# Altium PCB Shift_Relays.PcbDoc
Units mm, origin at the board's own origin, x right, y up, seen from the top; angles counter-clockwise.
Board outline 54.7 x 69.83 mm, 2 copper layers (Top Layer, Bottom Layer); 11 components, 11 nets, 43 pads, 1 vias.
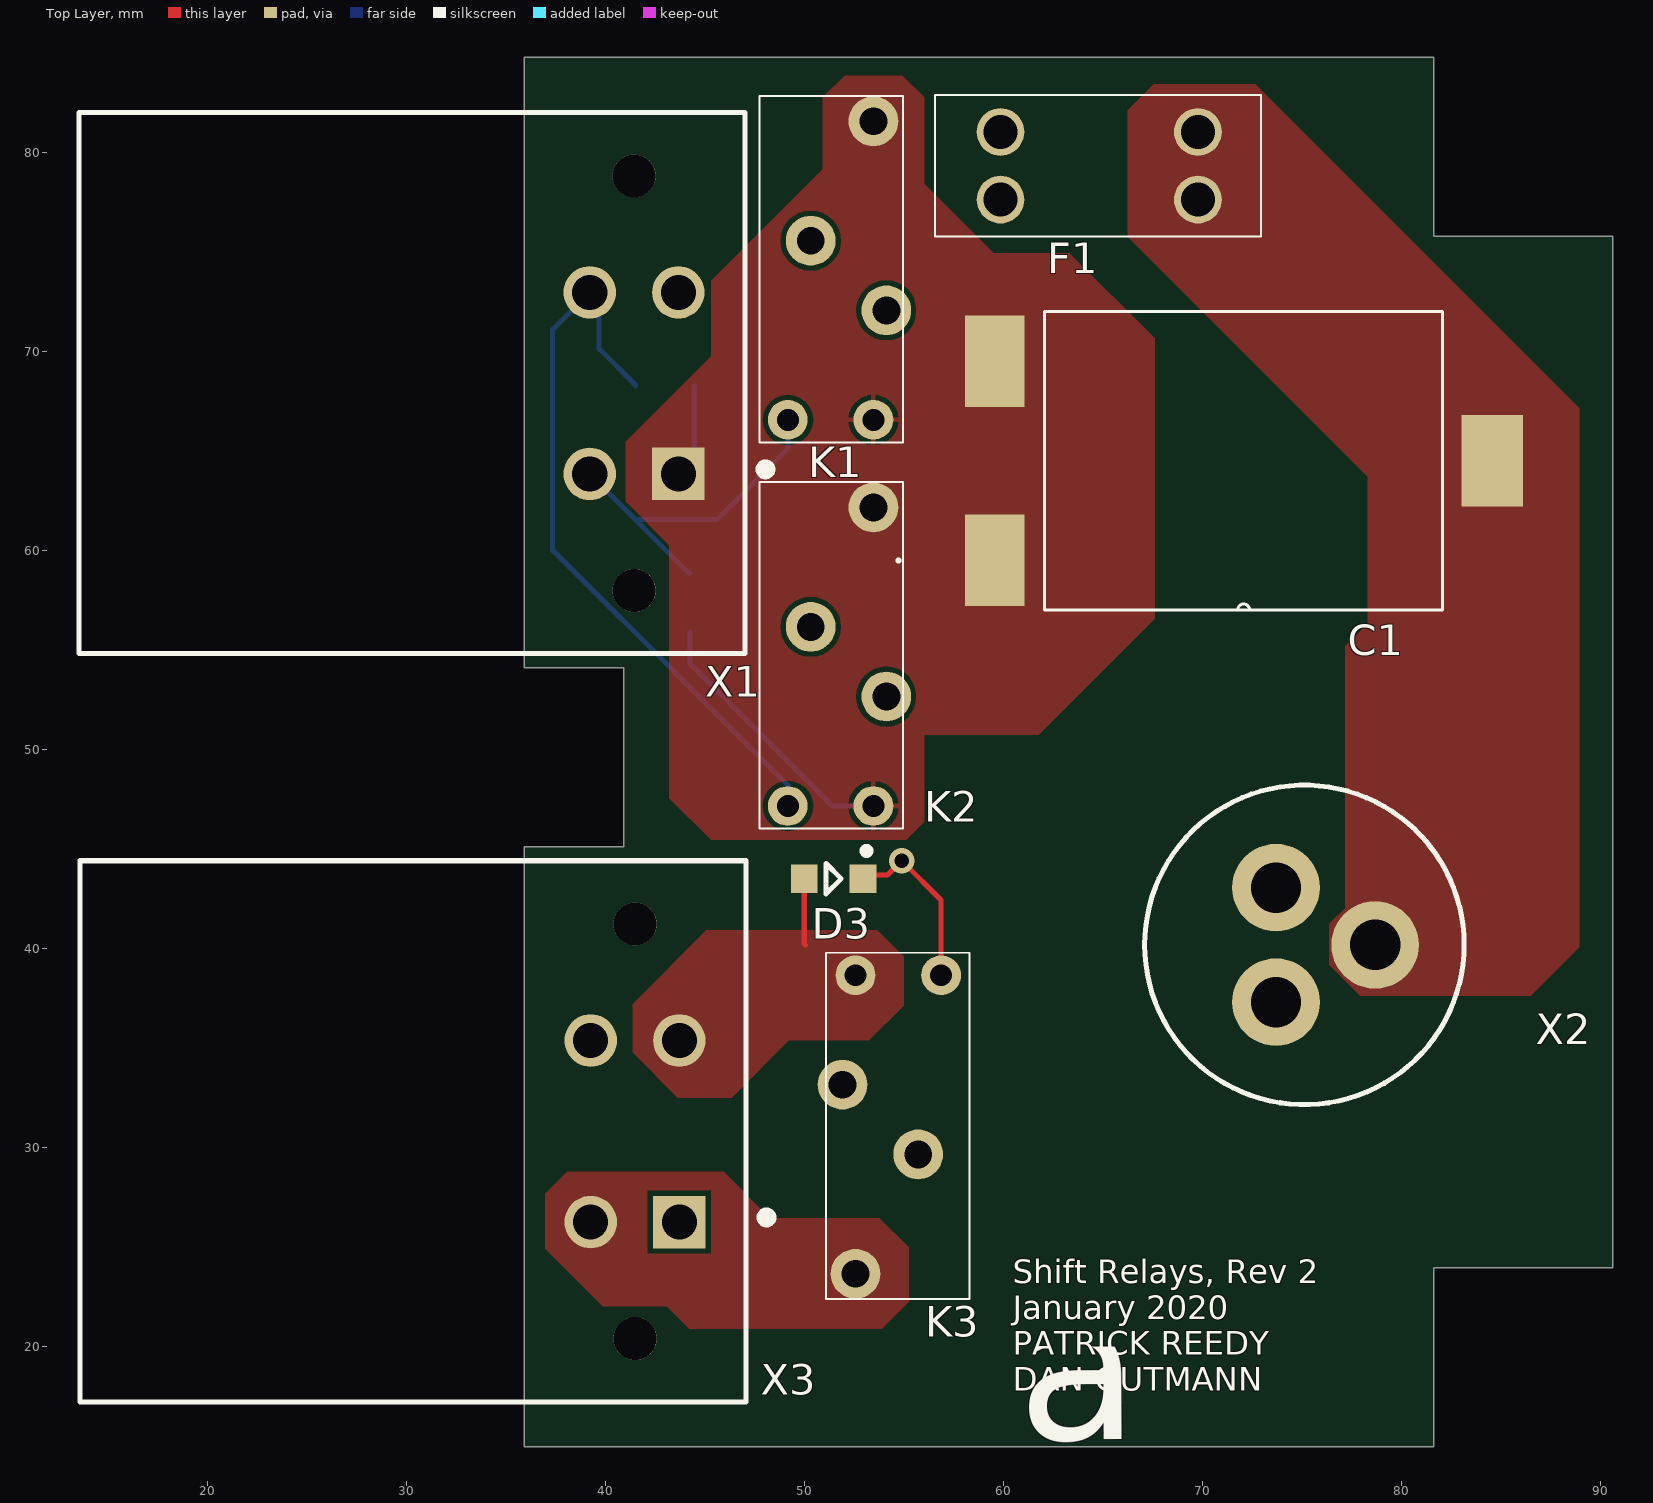
[diagram p0: Top Layer view]
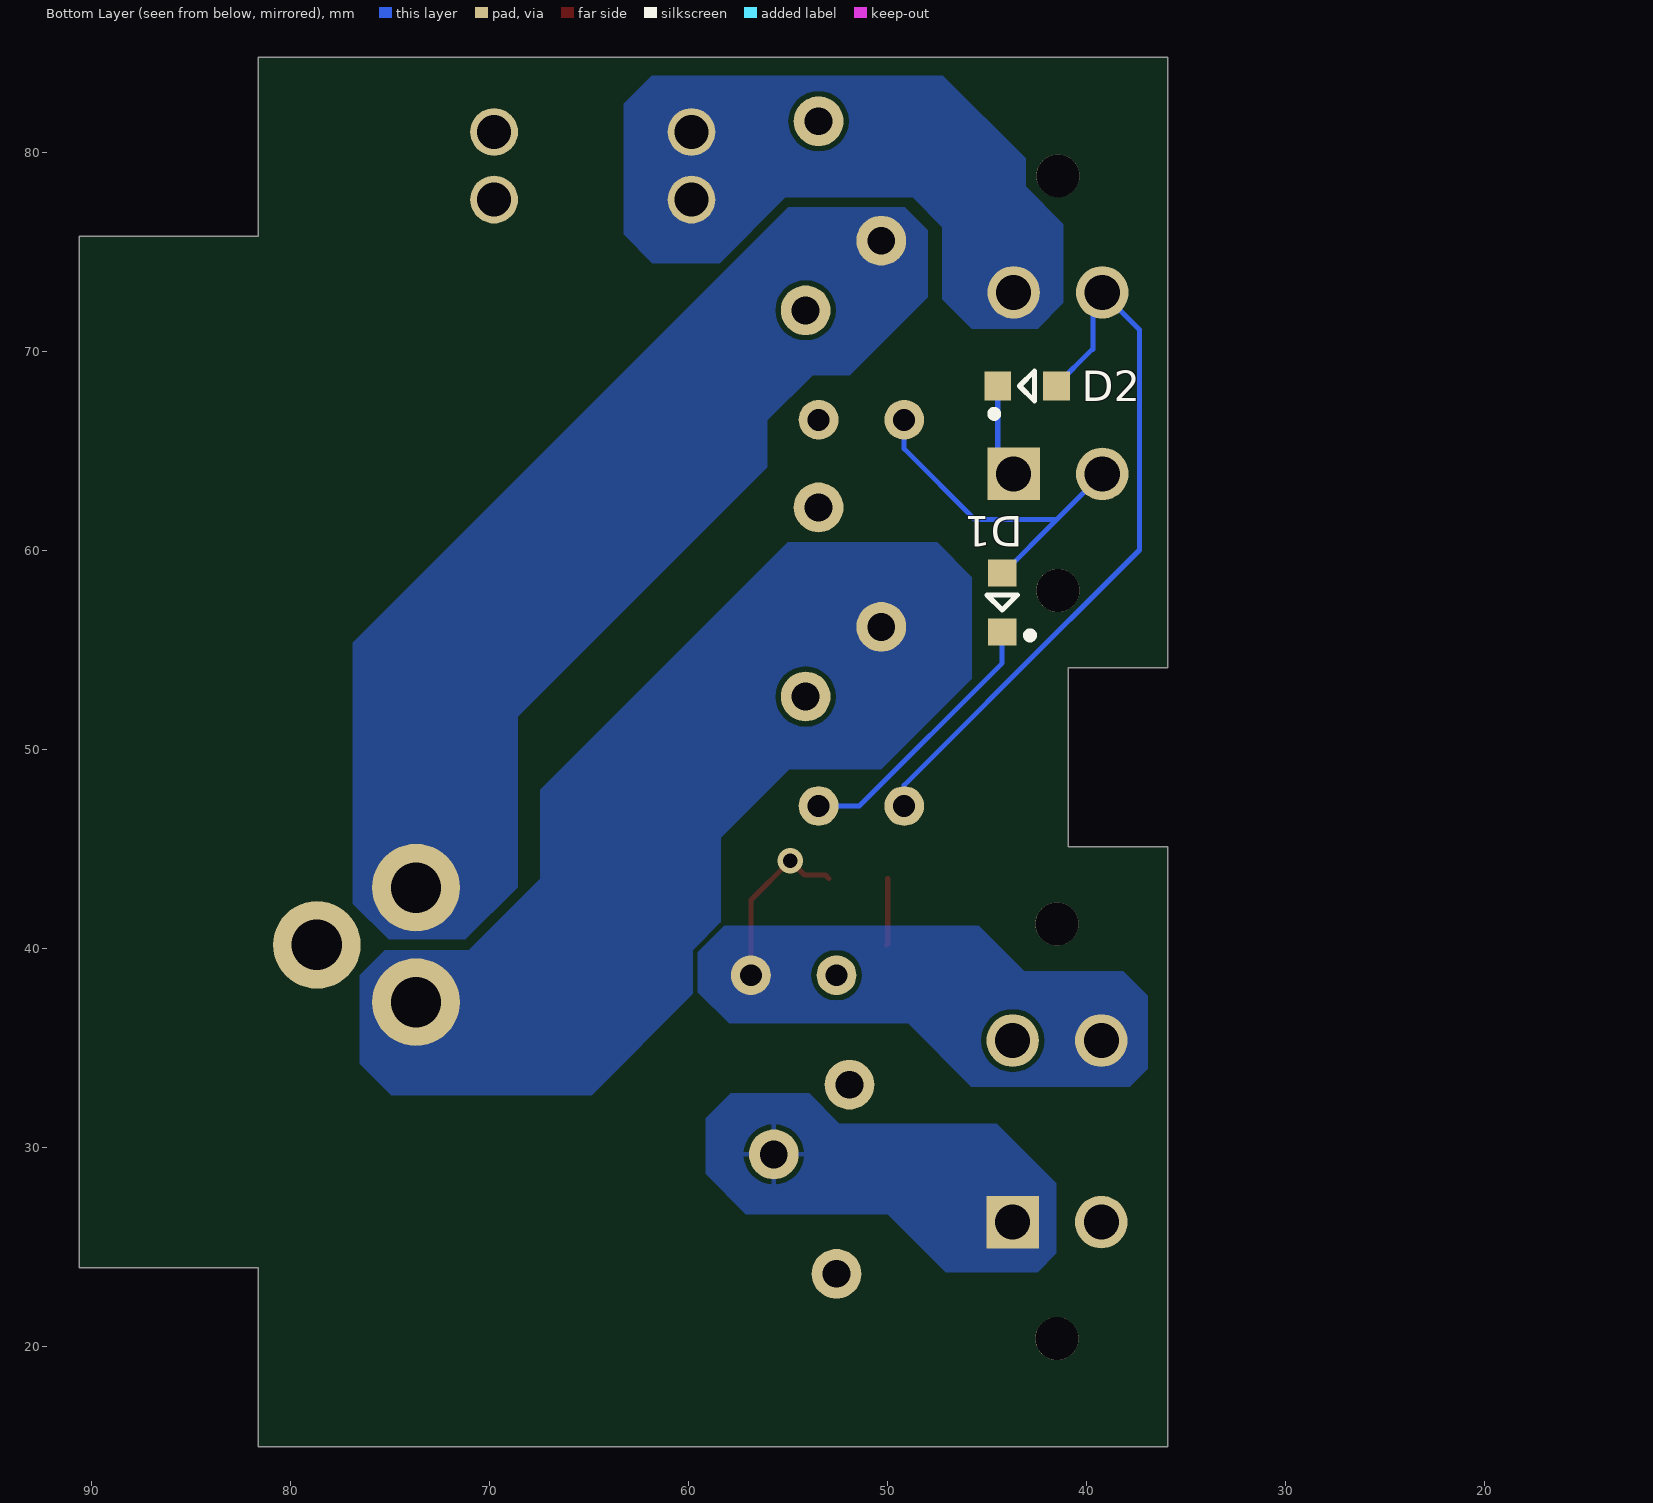
[diagram p1: Bottom Layer view, seen from below]

## Layer stack, top to bottom
Top Solder: solder mask 0.0102, Solder Resist, Dk 3.5
Top Layer: signal copper 0.0356
Dielectric 1: dielectric 0.32, FR-4, Dk 4.8
Bottom Layer: signal copper 0.0356
Bottom Solder: solder mask 0.0102, Solder Resist, Dk 3.5

## Board outline
35.9,54.125 40.9,54.125 40.9,45.125 35.9,45.125 35.9,14.975 81.6,14.975 81.6,23.975 90.6,23.975 90.6,75.8 81.6,75.8 81.6,84.8 35.9,84.8

## Design rules (kind name [scope] priority, off if disabled: settings)
BoardOutlineClearance [All] p1: gap=0.254 ignorepadtopadclearanceinfootprint=FALSE except(0: Arc-SplitContinuation Track-SplitContinuation SMDPad-SplitContinuation THPad-SplitContinuation Via-SplitContinuation Fill-SplitContinuation Poly-SplitContinuation Region-SplitContinuation Text-SplitContinuation)
Clearance [All] p1: gap=0.254 ignorepadtopadclearanceinfootprint=FALSE except(0: Arc-Hole Track-Hole SMDPad-Hole THPad-Hole Via-Hole Fill-Hole Poly-Hole Region-Hole Text-Hole)
PolygonConnect [All] p1: connectstyle=Relief reliefconductorwidth=0.254 reliefentries=4 polygonreliefangle="90 Angle" airgapwidth=0.254
RoutingVias [All] p1: holewidth=0.711 width=1.27 viastyle="Through Hole" minholewidth=0.711 minwidth=1.27 maxholewidth=0.711 maxwidth=1.27
SolderMaskExpansion [All] p1: expansion=0.102
Width [All] p1: maxlimit=0.254 minlimit=0.254 preferedwidth=0.254
30 further rules are at their usual default settings.

## Components (designator, comment, footprint, x,y, rotation, side; value= is the part's Value field where it differs from the comment)
C1 "Part Number: BZ05FB682ZSB" BZX5-S 72.05,64.525 r180 top value=Value
D1 "*" SOD123F 44.225,57.4 r270 bottom
D2 "*" SOD123F 42.975,68.275 r0 bottom
D3 "*" SOD123F 51.45,43.525 r0 top
F1 "Fuse" 3568-MiniFuseHolder 64.793,79.34 r0 top
K1 "ACTP112" ACTP112 49.64,81.577 r270 top
K2 "ACTP112" ACTP112 49.64,62.177 r270 top
K3 "ACTP112" ACTP112 56.36,23.675 r90 top
X1 "*" DTF13-4P 41.425,68.419 r270 top
X2 "=MfrPartNo" CONN_Shift 78.655,40.2 r90 top
X3 "*" DTF13-4P 41.475,30.835 r270 top

## Footprints (in the part's own frame and the unit in brackets; to place one, negate y for a bottom-side part, rotate by r counter-clockwise, add the part's x,y. Pads: shape width x height; smd on the part's side, far side on the other; paste and mask are expansions set on the pad)
3568-MiniFuseHolder [mm] "3568 Mini Fuse Holder"
  round 2.4 hole 1.7: 1(-4.96,-1.7) 1(-4.96,1.7) 2(4.96,-1.7) 2(4.96,1.7)
  silkscreen extent -8.25,-3.56 8.13,3.56, body extent -8,-4.19 8,3.38, height 16.17
ACTP112 [mm] "ACTP112, 12V Relay"
  round 2 hole 1.1: COIL1(15,3.81) COIL2(15,-0.49)
  round 2.5 hole 1.4: COM(0,3.81) NC(9.5,4.46) NO(6,0.66)
  silkscreen extent -1.27,-1.91 16.13,5.3, body extent -1.27,-1.91 16.13,5.33, height 13.5
BZX5-S [mil]
  rect 122x181 smd: 1(-492,0)
  rect 118x181 smd: 2(492,-197) 3(492,197)
  silkscreen extent -394,-296 686,296, body extent -490,-296 490,296, height 228
CONN_Shift [mm]
  round 4.4 hole 2.53: 1(2.875,4.98) 2(0,0) 3(-2.875,4.98)
  silkscreen extent -8.02,-4.47 8.02,11.58, body extent -10.66,-7.1 14.4,14.22, height 15.56
DTF13-4P [mm]
  rect 2.64x2.64 hole 1.76: 1(4.561,2.223)
  round 2.64 hole 1.76: 2(4.561,-2.227) 3(-4.559,-2.227) 4(-4.559,2.223)
  round 2.16 hole 2.16 unplated: None(-10.415,0) None(10.415,0)
  silkscreen extent -13.59,-27.88 13.59,6.85, body extent -13.59,-27.94 13.59,5.52, height 23.53
SOD123F [mm] "SODFL, 2-Leads, Body 1.80x3.50mm, IPC Low Density"
  rect 1.35x1.45 smd: 1(-1.475,0) 2(1.475,0)
  silkscreen extent -0.38,-0.76 1.75,1.5, body extent -1.75,-0.95 1.75,0.95, height 1.15

## Part data
C1: library part 11, "6.8mF (EDLC) Supercapacitor 15V BZ05, 3 Lead", Manufacturer_Part_Number=BZ05FB682ZSB, package="Surface Mount", percent tolerance=80, voltage=15, Built_By=EMA_UL_Team, Copyright="Copyright (C) 2018 Accelerated Designs. All rights reserved", createdby="Patrick Reedy", createddate="1/11/2020 3:48:08 PM", ESR=1, id=11, link=https://www.digikey.com/products/en/capacitors/electric-double-layer-capacitors-edlc-supercapacitors/61?k=&pkeyword=&sv=0&pv2049=u6.8mF&sf=1&FV=-8%7C61&quantity=&ColumnSort=0&page=1&pageSize=25, name=BZ05FB682ZSB, quantity=0, RefDes=RefDes, Type=DEV, Vendor="AVX Corporation"
D1 D2 D3: library part 2, "Diode Super Barrier 40V 1A Surface Mount SOD-", package=SOD-123, id=2, link=https://www.digikey.com/product-detail/en/diodes-incorporated/1N5819HW1-7-F/1N5819HW1-7-FDITR-ND/5768523, name=1N5819, quantity=0
F1: library part 3, id=3, iinterrupt=0, itrip=0, link=https://www.digikey.com/product-detail/en/keystone-electronics/3568/36-3568-ND/2137306, name="3568 Mini Fuse Holder", quantity=0, vmax=0
K1 K2 K3: library part 1, current=0, voltage=12, createdby=Kevin, id=1, LatestRevisionDate=17-Jul-2002, LatestRevisionNote="Re-released for DXP Platform.", link=https://www.digikey.com/product-detail/en/panasonic-electric-works/ACTP112/255-5163-ND/4691838, name=ACTP112, PackageReference=MODULE5B, Published=8-Jun-2000, Publisher="Altium Limited", quantity=0
X1 X3: library part 15, "DTF13-4P", id=15, link=https://www.te.com/usa-en/product-DTF13-4P.html, name=DTF13-4P, numcontacts=4, quantity=0
X2: library part 31, "Connector for Shift Relays", createdby=Patrick, id=31, name="CONN Shift", numcontacts=3, quantity=0

## Via types
v1: diameter 1.27, hole 0.711, Top Layer to Bottom Layer, 1 vias

## Nets (pads, with @x,y where several pads share a name; then routed paths per layer and width w, separated by ;. In a path a pad name is that pad's centre, name@x,y a point inside that pad or via, vN(x,y) a via of type N, cw(c..) or ccw(c..) an arc to the next point about the centre after c; other vN are vias at no path point)
12V: C1.2 C1.3 D1.2 D2.2 K1.COIL1 K1.COM K2.COIL1 K2.COM X1.1 | length 18.9
  Bottom Layer w0.254: X1.1 44.45,64.66 D2.2 ; D1.2 44.225,54.35 51.4,47.175 53.448,47.175 K2.COIL1 ; K1.COIL1@53.046,66.577 K1.COIL1
BSPD_OK: D3.2 K3.COIL2 X3.3 | length 8.9
  Top Layer w0.254: D3.2 53.107,43.707 54.157,43.707 v1(54.875,44.425) 56.85,42.45 K3.COIL2
DN: K2.NO X2.3
DN_SIG: D2.1 K2.COIL2 X1.3 | length 37.2
  Bottom Layer w0.254: D2.1 41.5,68.325 39.705,70.12 39.655,70.12 39.655,72.522 X1.3 37.325,71.105 37.325,60.038 40.82,56.543 40.832,56.543 49.15,48.225 K2.COIL2
"ECU M+": K3.COM X3.2
GND: F1.1 X1.4 | length 0.2
  Top Layer w0.254: X1.4@43.648,72.748 X1.4
GND_SIG: C1.1 F1.2 X2.2
M+: K3.NO X3.1
NetD3_1: D3.1 K3.COIL1 X3.4 | length 3.4
  Top Layer w0.254: X3.4@43.65,35.442 X3.4 ; D3.1 49.975,40.25 50.025,40.2
UP: K1.NO X2.1
UP_SIG: D1.1 K1.COIL2 X1.2 | length 17.7
  Bottom Layer w0.254: X1.2@39.198,63.802 X1.2 41.481,61.575 ; D1.1 44.175,58.875 41.481,61.569 41.481,61.575 ; K1.COIL2 49.15,65.125 45.6,61.575 41.481,61.575
pads on no net: K1.NC K2.NC K3.NC X1.None X3.None

## Polygon pours and split planes (outlines as drawn)
no net on Mechanical 16 (solid): 1,49.6
12V on Top Layer "Top Layer-12V 1" (solid, pour order 86): 55.625,80.013 55.625,78.825 59.5,74.95 63.3,74.95 67.575,70.675 67.575,56.575 61.75,50.75 55.275,50.75
"ECU M+" on Top Layer "Top Layer-ECU M+" (solid, pour order 70): 36.975,24.925 36.975,27.7 38.075,28.8 45.925,28.8 48.25,26.475 53.75,26.475 55.225,25 55.225,22.275 53.875,20.925 44.2,20.925 43.075,22.05 39.85,22.05
12V on Top Layer "Top Layer-12V" (solid, pour order 55): 52,83.875 50.9,82.775 50.9,79.175 45.3,73.575 45.3,69.775 41,65.475 41,62.475 43.2,60.275 43.2,47.575 45.3,45.475 55.1,45.475 56,46.375 56,82.775 54.9,83.875
NetD3_1 on Top Layer "Top Layer-NetD3_1" (solid, pour order 90): 41.35,37.225 45.05,40.925 53.65,40.925 54.975,39.6 54.975,37.15 53.225,35.4 49.2,35.4 46.325,32.525 43.625,32.525 41.35,34.8
GND_SIG on Top Layer "Top Layer-GND_SIG 1" (solid, pour order 88): 78.275,57.15 78.275,56.325 77.15,55.2 77.15,42.05 76.35,41.25 76.35,39.2 77.9,37.65 86.475,37.65 88.9,40.075 88.9,57.35
GND_SIG on Top Layer "Top Layer-GND_SIG" (solid, pour order 79): 66.225,75.775 66.225,82.125 67.525,83.425 72.625,83.425 88.9,67.15 88.9,56.175 86.325,53.6 81.825,53.6 78.275,57.15 78.275,63.725
no net on Top Layer "Top Layer-No Net 4" (solid, pour order 77): 90.6,84.8
no net on Top Layer "Top Layer-No Net" (solid, pour order 30): 29.1,38.1
no net on Top Layer "Top Layer-No Net 1" (solid, pour order 18): 55.4,49.3
no net on Top Layer "Top Layer-No Net 2" (solid, pour order 6): 36.3,26.7
no net on Top Layer "Top Layer-No Net 3" (solid, pour order 0): 46.833,44.563
DN on Bottom Layer "Bottom Layer-DN" (solid, pour order 84): 45.75,53.575 45.75,58.675 47.5,60.425 55,60.425 67.425,48 67.425,43.525 71.025,39.925 75.25,39.925 76.5,38.675 76.5,34.225 74.925,32.65 64.85,32.65 58.375,39.125 58.375,45.575 54.925,49.025 50.3,49.025
UP on Bottom Layer "Bottom Layer-UP" (solid, pour order 82): 49.125,77.25 47.975,76.1 47.975,72.725 51.875,68.825 53.75,68.825 56.025,66.55 56.025,64.2 68.575,51.65 68.575,43.1 71.2,40.475 75.05,40.475 76.85,42.275 76.85,55.375 54.975,77.25
M+ on Bottom Layer "Bottom Layer-M+" (solid, pour order 80): 42.45,23.75 41.5,24.7 41.5,28.225 44.5,31.225 52.4,31.225 53.925,32.75 57.875,32.75 59.125,31.5 59.125,28.7 57.1,26.675 49.975,26.675 47.05,23.75
GND on Bottom Layer "Bottom Layer-GND_SIG" (solid, pour order 74): 42.45,71.15 41.15,72.45 41.15,76.4 43.05,78.3 43.05,79.725 47.2,83.875 61.825,83.875 63.25,82.45 63.25,75.9 61.8,74.45 58.425,74.45 55.125,77.75 48.725,77.75 47.225,76.25 47.225,72.625 45.75,71.15
BSPD_OK on Bottom Layer "Bottom Layer-BSPD_OK" (solid, pour order 73): 37.825,33.075 36.925,33.975 36.925,37.65 38.15,38.875 43.125,38.875 45.4,41.15 58.2,41.15 59.525,39.825 59.525,37.825 57.95,36.25 48.95,36.25 45.775,33.075
no net on Bottom Layer "Bottom Layer-No Net" (solid, pour order 36): 35.9,21.7
no net on Mechanical 13 (solid): 39,27.1
no net on Mechanical 15 (solid): 41.95,24.2

## Silkscreen, mask and mechanical layers (free items; w line width, h text height)
Top Overlay:
  text "Shift Relays, Rev 2 / January 2020 / PATRICK REEDY / DAN GUTMANN" at 60.45,17.8 h1.2
  text "a" at 60.7,11.55 h20 r0.25